# Altium PCB Jlink_V9.PcbDoc
Units mm, origin at the board's own origin, x right, y up, seen from the top; angles counter-clockwise.
Board outline 35.79 x 32.89 mm, 2 copper layers (Top Layer, Bottom Layer); 46 components, 34 nets, 199 pads, 132 vias.
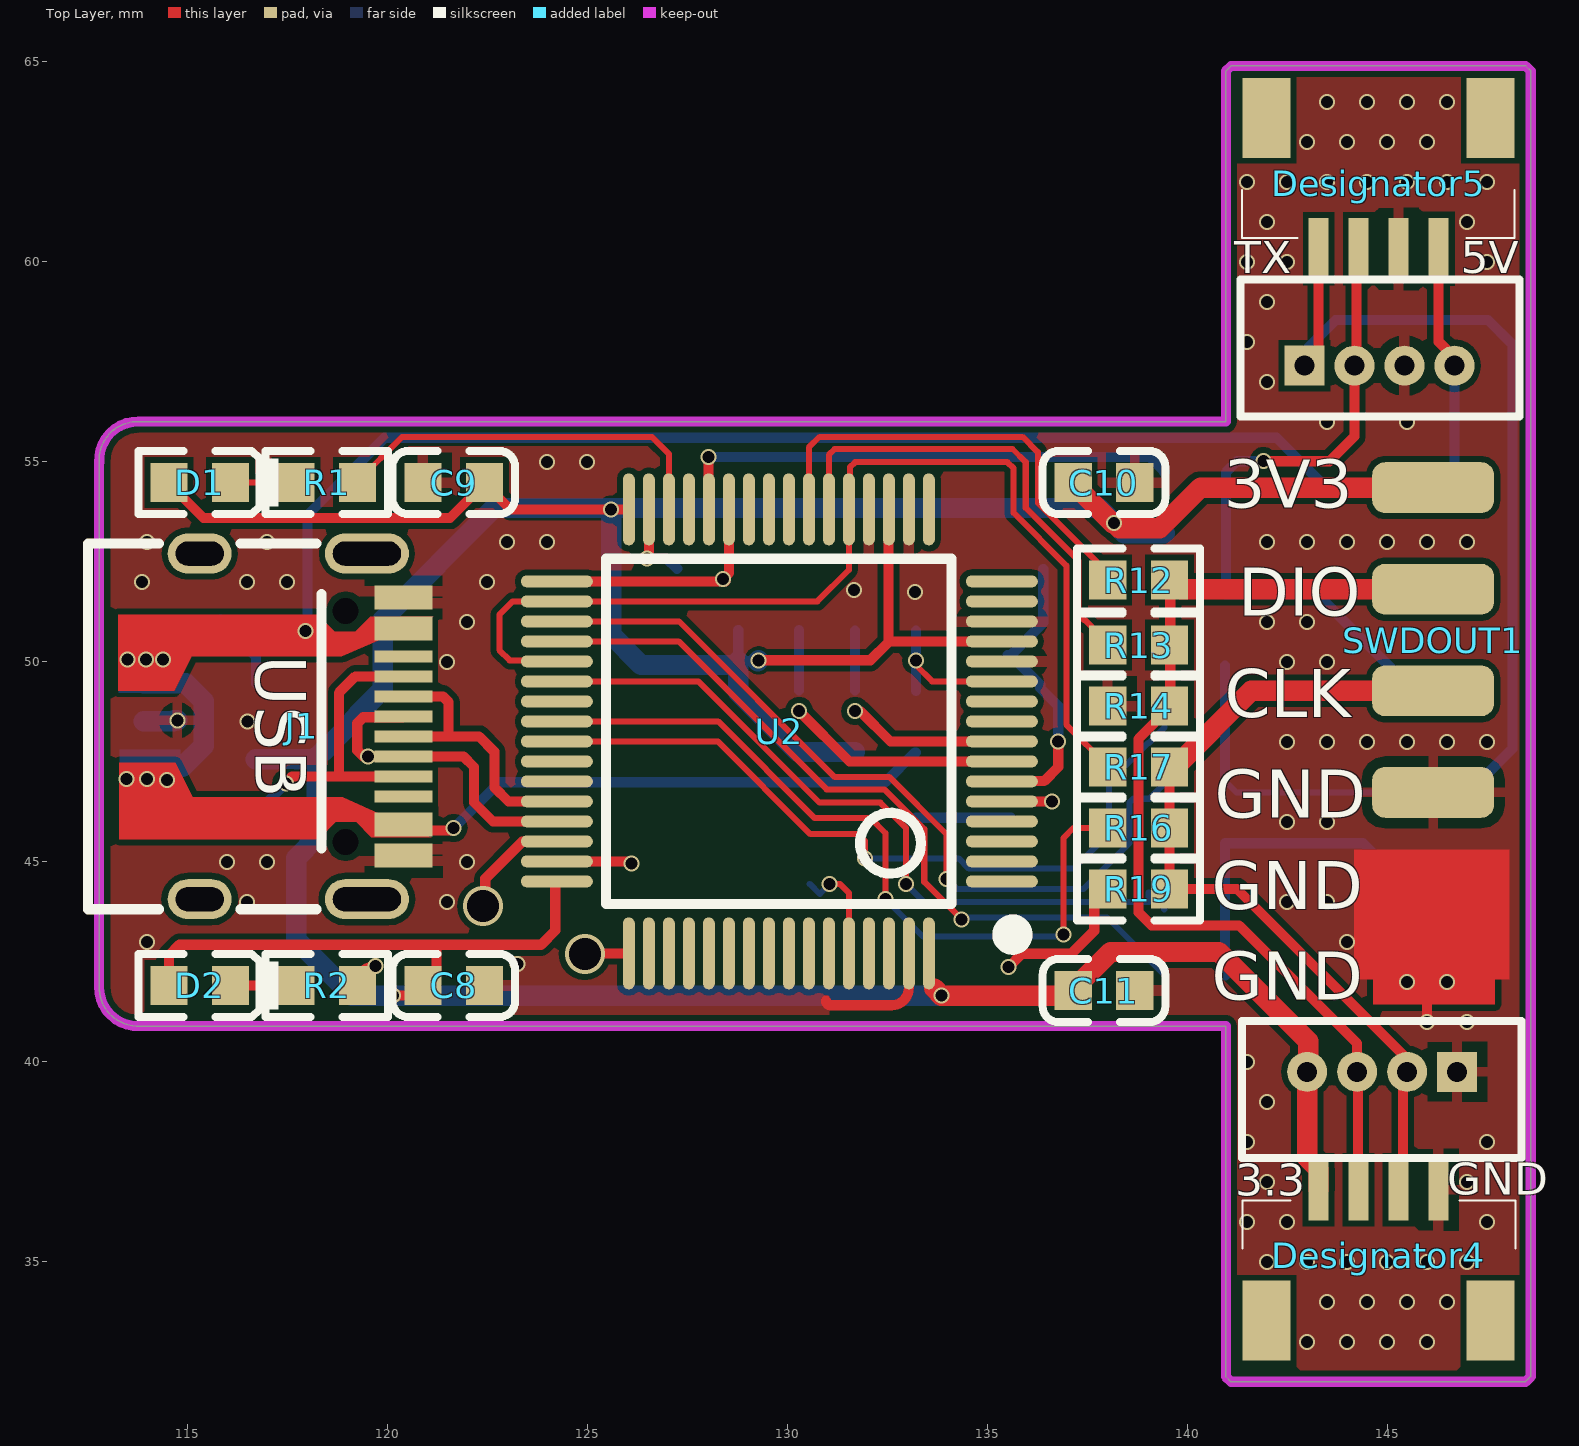
[diagram p0: Top Layer view]
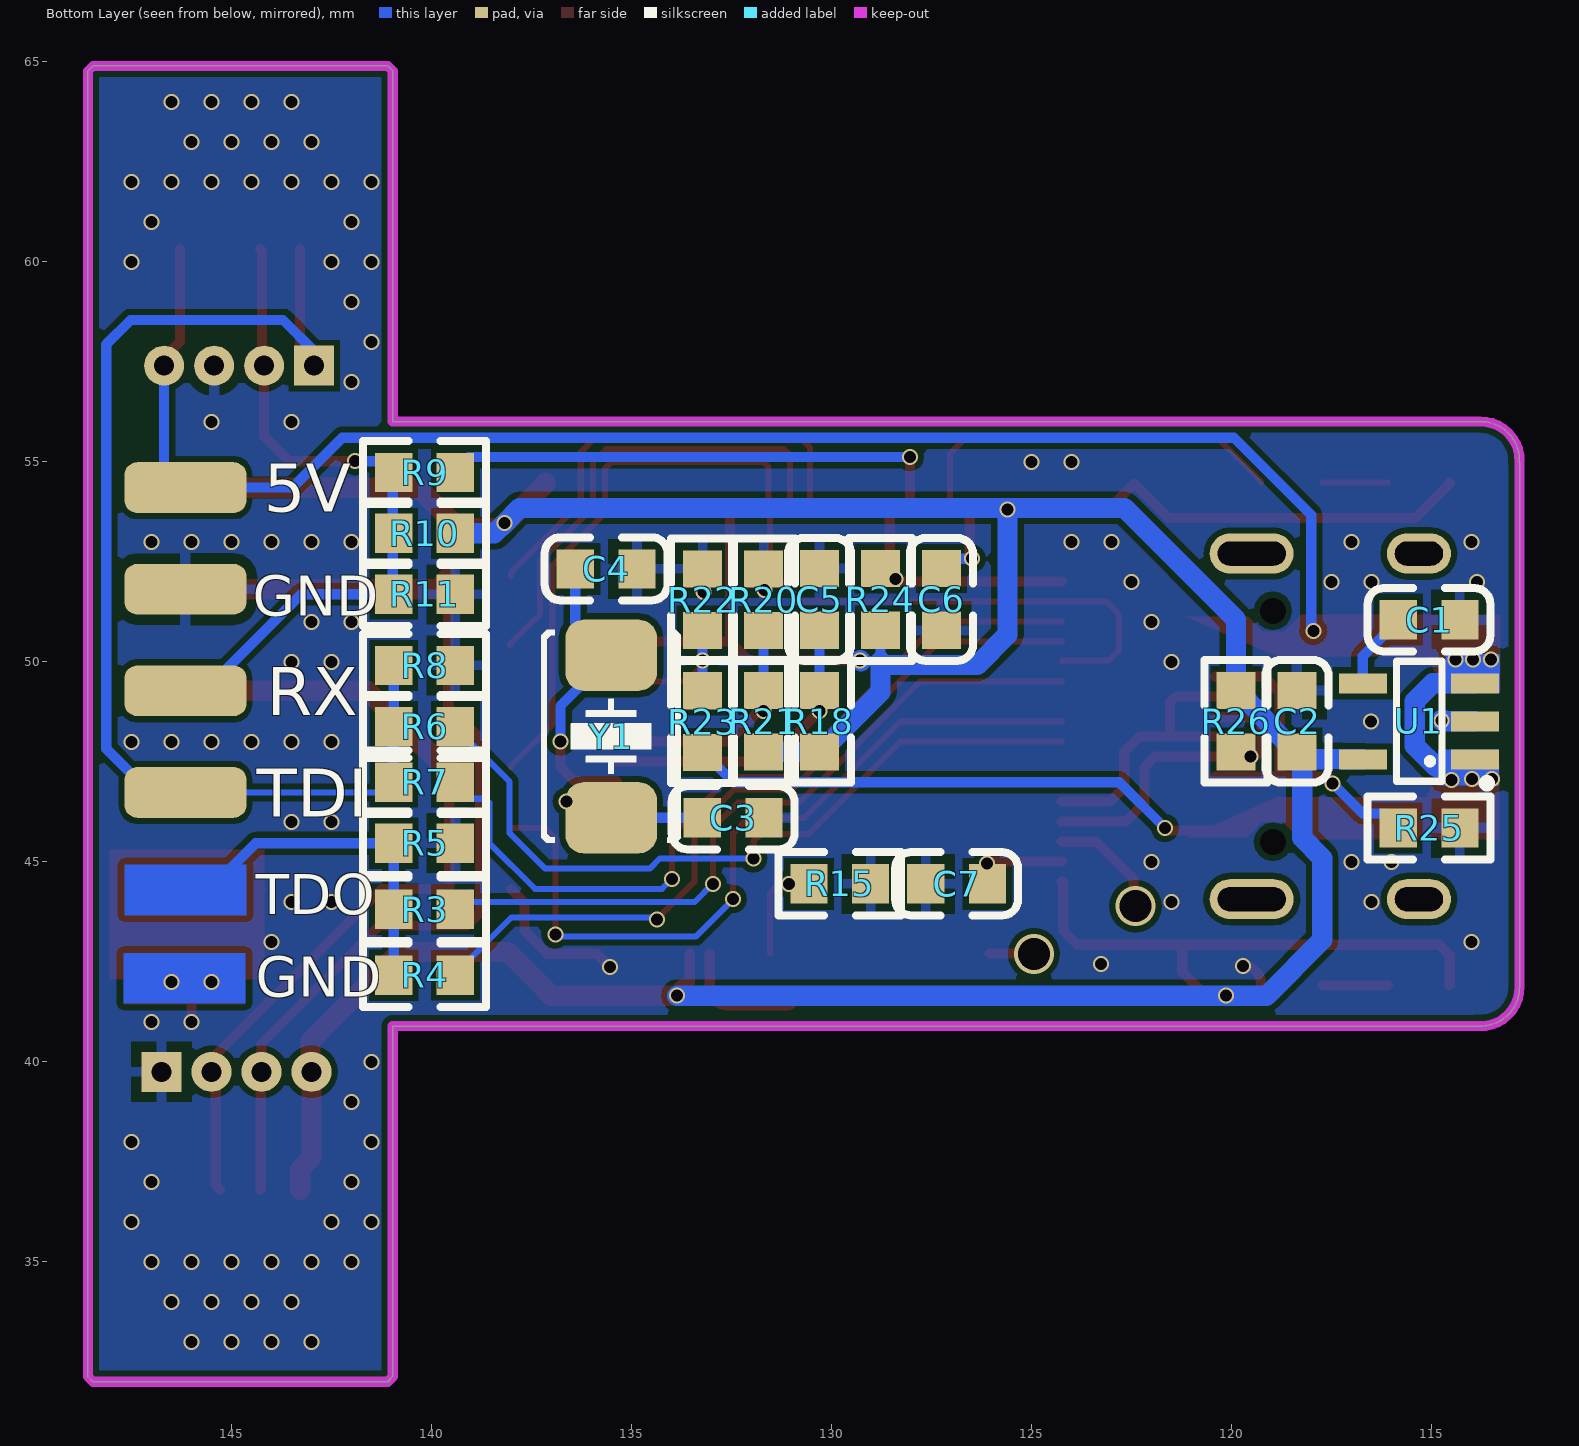
[diagram p1: Bottom Layer view, seen from below]
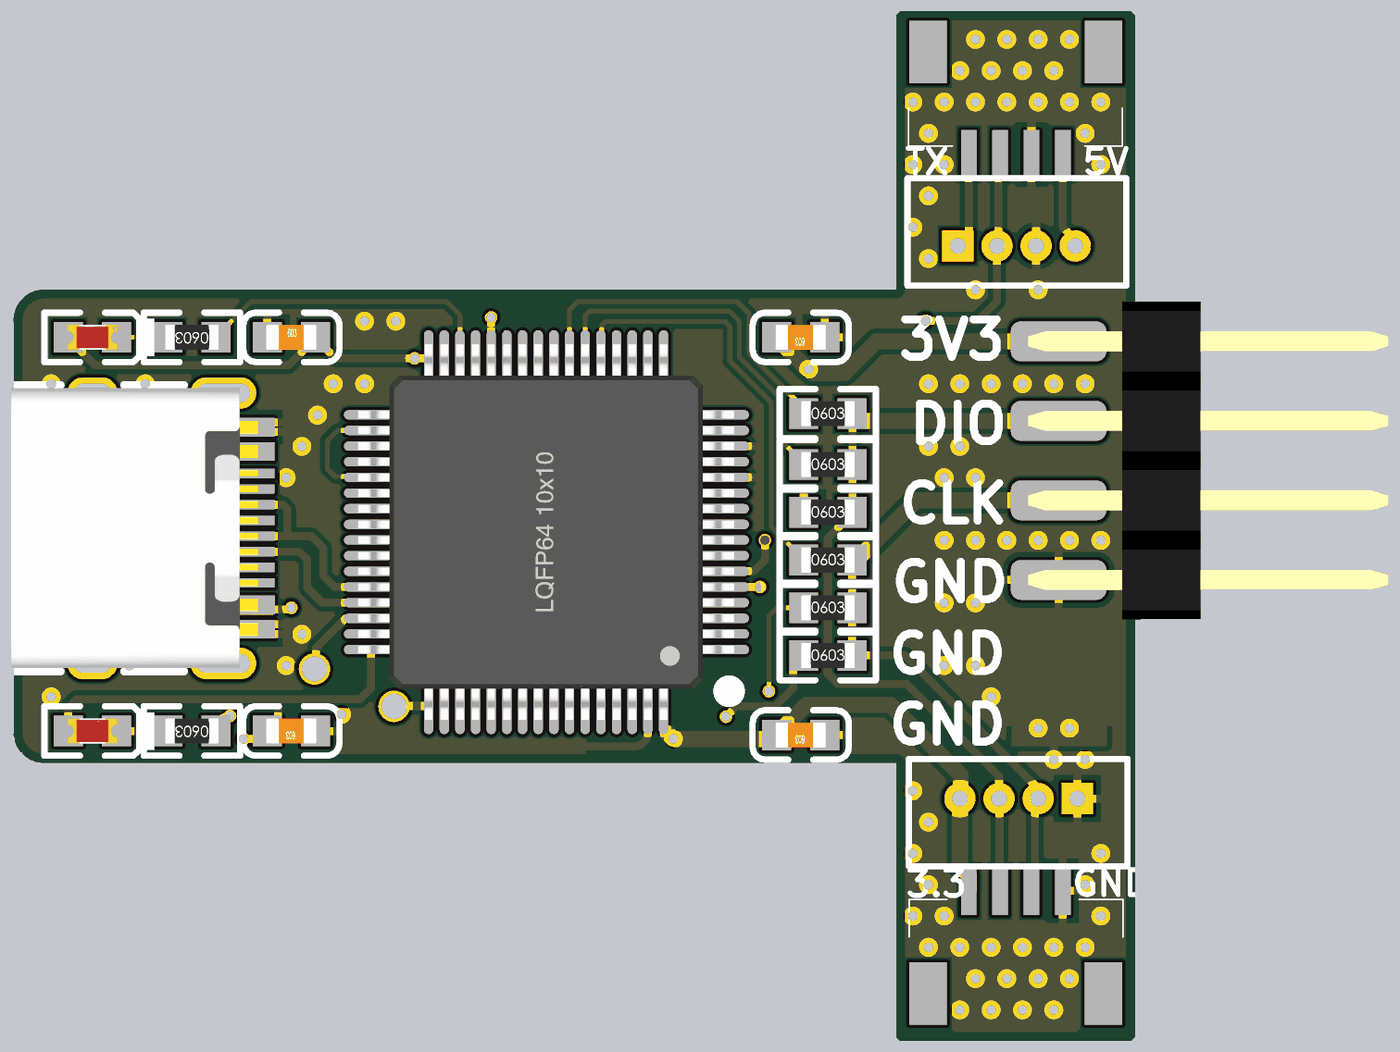
[diagram p2: 3D render of the assembled board from above, using the file's embedded part models]
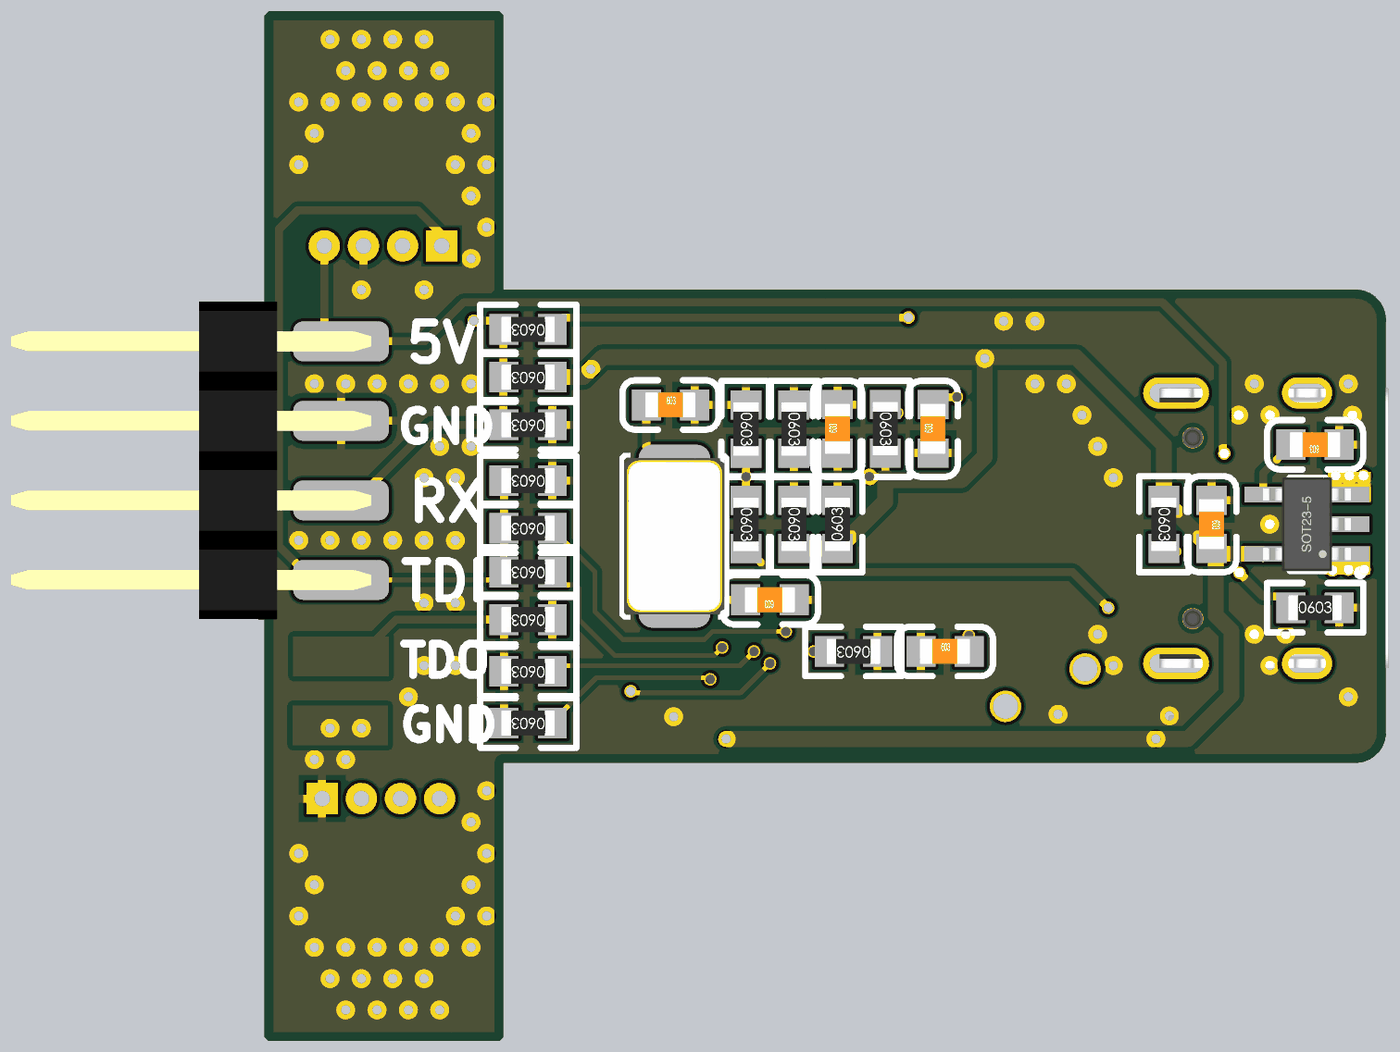
[diagram p3: 3D render of the assembled board from below, using the file's embedded part models]

## Layer stack, top to bottom
Top Solder: solder mask 0.0102, Solder Resist, Dk 3.5
Top Layer: signal copper 0.0356
Dielectric 1: dielectric 0.32, FR-4, Dk 4.8
Bottom Layer: signal copper 0.0356
Bottom Solder: solder mask 0.0102, Solder Resist, Dk 3.5

## Board outline
112.801,41.885 112.801,54.991 112.802,54.991 cw(c113.767,55.042) 113.792,56.007 140.97,56.007 140.97,64.77 141.097,64.897 148.463,64.897 148.59,64.77 148.59,32.131 148.463,32.004 141.097,32.004 140.97,32.131 140.97,40.894 113.792,40.894 113.817,40.895 cw(c113.767,41.859)

## Design rules (kind name [scope] priority, off if disabled: settings)
Clearance [All] p1: gap=0.152 ignorepadtopadclearanceinfootprint=FALSE
PolygonConnect [All] p1: connectstyle=Relief reliefconductorwidth=0.254 reliefentries=4 polygonreliefangle="90 Angle" airgapwidth=0.254
RoutingVias [All] p1: holewidth=0.3 width=0.4 viastyle="Through Hole" minholewidth=0.3 minwidth=0.4 maxholewidth=0.3 maxwidth=0.4
SolderMaskExpansion [All] p1: expansion=0.102
Width [All] p1: maxlimit=0.508 minlimit=0.152 preferedwidth=0.254
30 further rules are at their usual default settings.

## Classes and differential pairs
component class Jlink_V9: C1 C2 C4 C5 C6 C7 C8 C9 C10 C11 D1 D2 J1 R1 R2 R3 R4 R5 R6 R7 R8 R9 R10 R11 R12 R13 R14 R15 R16 R17 R18 R19 R20 R21 R22 R23 R24 R25 R26 SWDOUT1 U1 U2 Y1

## Components (designator, comment, footprint, x,y, rotation, side; value= is the part's Value field where it differs from the comment)
C1 "Cap" LC-0603_C 115.062,51.054 r0 bottom value=223
C2 "Cap" LC-0603_C 118.364,48.514 r270 bottom value=104
C3 "12pf" LC-0603_C 132.461,46.101 r0 bottom
C4 "12pf" LC-0603_C 135.636,52.324 r180 bottom
C5 "Cap" LC-0603_C 130.302,51.562 r90 bottom value=104
C6 "Cap" LC-0603_C 127.254,51.562 r90 bottom value=2.2uf
C7 "Cap" LC-0603_C 126.873,44.45 r180 bottom value=2.2uf
C8 "Cap" LC-0603_C 121.666,41.91 r180 top value=104
C9 "Cap" LC-0603_C 121.666,54.483 r0 top value=104
C10 "Cap" LC-0603_C 137.922,54.483 r180 top value=104
C11 "Cap" LC-0603_C 137.922,41.783 r180 top value=104
D1 "白灯 0603" 0603_LED_S1 115.316,54.483 r180 top
D2 "白灯 0603" 0603_LED_S1 115.316,41.91 r180 top
Designator4 "Comment" 1.0MM插座_4P 141.986,33.528 r0 top
Designator5 "Comment" 1.0MM插座_4P 147.588,63.6 r180 top
J1 "USB type C" "USB Type-C-16Pin_A" 115.316,48.387 r270 top
R1 "Resistor Chip" LC-0603_R 118.491,54.483 r180 top value=102
R2 "Resistor Chip" LC-0603_R 118.491,41.91 r180 top value=102
R3 "Resistor Chip" LC-0603_R 140.176,43.815 r0 bottom value=101
R4 "Resistor Chip" LC-0603_R 140.176,42.164 r0 bottom value=101
R5 "Resistor Chip" LC-0603_R 140.176,45.466 r0 bottom value=220K
R6 "Resistor Chip" LC-0603_R 140.176,48.387 r0 bottom value=101
R7 "Resistor Chip" LC-0603_R 140.176,46.99 r0 bottom value=101
R8 "Resistor Chip" LC-0603_R 140.176,49.911 r0 bottom value=220K
R9 "Resistor Chip" LC-0603_R 140.176,54.737 r0 bottom value=101
R10 "Resistor Chip" LC-0603_R 140.176,53.213 r0 bottom value=103
R11 "Resistor Chip" LC-0603_R 140.176,51.689 r0 bottom value=103
R12 "Resistor Chip" LC-0603_R 138.787,52.045 r0 top value=221
R13 "Resistor Chip" LC-0603_R 138.787,50.419 r0 top value=331
R14 "Resistor Chip" LC-0603_R 138.787,48.895 r0 top value=103
R15 "Resistor Chip" LC-0603_R 129.794,44.45 r0 bottom value=103
R16 "Resistor Chip" LC-0603_R 138.787,45.847 r0 top value=221
R17 "Resistor Chip" LC-0603_R 138.787,47.371 r0 top value=101
R18 "Resistor Chip" LC-0603_R 130.302,48.514 r90 bottom value=103
R19 "Resistor Chip" LC-0603_R 138.787,44.323 r0 top value=103
R20 "Resistor Chip" LC-0603_R 131.699,51.554 r270 bottom value=103
R21 "Resistor Chip" LC-0603_R 131.699,48.514 r270 bottom value=103
R22 "Resistor Chip" LC-0603_R 133.223,51.554 r270 bottom value=103
R23 "Resistor Chip" LC-0603_R 133.223,48.506 r270 bottom value=103
R24 "Resistor Chip" LC-0603_R 128.778,51.562 r270 bottom value=103
R25 "Res2" LC-0603_R 115.062,45.847 r180 bottom value=10K
R26 "Res2" LC-0603_R 119.888,48.514 r270 bottom value=10K
SWDOUT1 "HDR2x6_2.54" HDR2X4_2.54_180H 146.152,54.356 r0 top
U1 "RT9193-3.3" SOT23-5N 115.319,48.514 r90 bottom
U2 "STM32F205RET6" "LQFP64 10x10_N" 129.794,48.26 r90 top
Y1 "12Mhz" XT_5032_2 135.509,48.133 r270 bottom

## Footprints (in the part's own frame and the unit in brackets; to place one, negate y for a bottom-side part, rotate by r counter-clockwise, add the part's x,y. Pads: shape width x height; smd on the part's side, far side on the other; paste and mask are expansions set on the pad)
1.0MM插座_4P [mm] "间距1.0mm"
  rect 0.5x1.55 smd: 1(4.3,3.275) 2(3.3,3.275) 3(2.3,3.275) 4(1.3,3.275)
  rect 1.2x2 smd: 5(0,0) 6(5.6,0)
  silkscreen extent -0.6,1.8 6.22,3
0603_LED_S1 [mm]
  rect 0.93x0.98 smd: A(0.77,0) K(-0.77,0)
  silkscreen extent -1.97,-0.79 1.54,0.79, body extent -0.8,-0.4 0.8,0.4, height 0.6
HDR2X4_2.54_180H [mil]
  rrect50% 120x50 smd: 1(0,0) 3(0,-100) 5(0,-200) 7(0,-300)
  rrect50% 120x50 smd far side: 2(0,0) 4(0,-100) 6(0,-200) 8(0,-300)
  body extent -38,-350 415,50, height 78
LC-0603_C [mm]
  rect 0.93x0.98 smd: 1(-0.77,0) 2(0.77,0)
  silkscreen extent -1.53,-0.79 1.54,0.79, body extent -0.8,-0.4 0.8,0.4, height 0.3
LC-0603_R [mm]
  rect 0.93x0.98 smd: 1(-0.77,0) 2(0.77,0)
  silkscreen extent -1.53,-0.79 1.54,0.79, body extent -0.85,-0.4 0.85,0.4, height 0.56
"LQFP64 10x10_N" [mm] "64脚，体宽10x10mm，脚距0.5mm"
  oval 0.3x1.8 smd: 1(-3.75,-5.575) 2(-3.25,-5.575) 3(-2.75,-5.575) 4(-2.25,-5.575) 5(-1.75,-5.575) 6(-1.25,-5.575) 7(-0.75,-5.575) 8(-0.25,-5.575) 9(0.25,-5.575) 10(0.75,-5.575) 11(1.25,-5.575) 12(1.75,-5.575) 13(2.25,-5.575) 14(2.75,-5.575) 15(3.25,-5.575) 16(3.75,-5.575) 33(3.75,5.55) 34(3.25,5.55) 35(2.75,5.55) 36(2.25,5.55) 37(1.75,5.55) 38(1.25,5.55) 39(0.75,5.55) 40(0.25,5.55) 41(-0.25,5.55) 42(-0.75,5.55) 43(-1.25,5.55) 44(-1.75,5.55) 45(-2.25,5.55) 46(-2.75,5.55) 47(-3.25,5.55) 48(-3.75,5.55)
  oval 1.8x0.3 smd: 17(5.55,-3.75) 18(5.55,-3.25) 19(5.55,-2.75) 20(5.55,-2.25) 21(5.55,-1.75) 22(5.55,-1.25) 23(5.55,-0.75) 24(5.55,-0.25) 25(5.55,0.25) 26(5.55,0.75) 27(5.55,1.25) 28(5.55,1.75) 29(5.55,2.25) 30(5.55,2.75) 31(5.55,3.25) 32(5.55,3.75) 49(-5.55,3.75) 50(-5.55,3.25) 51(-5.55,2.75) 52(-5.55,2.25) 53(-5.55,1.75) 54(-5.55,1.25) 55(-5.55,0.75) 56(-5.55,0.25) 57(-5.55,-0.25) 58(-5.55,-0.75) 59(-5.55,-1.25) 60(-5.55,-1.75) 61(-5.55,-2.25) 62(-5.55,-2.75) 63(-5.55,-3.25) 64(-5.55,-3.75)
  silkscreen extent -5.33,-6.09 4.32,4.32, body extent -6,-6 6,6, height 1.45
SOT23-5N [mm] "3x1.6x1.1mm(长宽高)"
  rect 0.5x1.2 smd: 1(-0.95,-1.4) 2(0,-1.4) 3(0.95,-1.4) 4(0.95,1.4) 5(-0.95,1.4)
  silkscreen extent -1.63,-1.78 1.5,0.56, body extent -1.5,-1.4 1.5,1.4, height 1.15
"USB Type-C-16Pin_A" [mm]
  round 0 hole 0.65: 0(-2.89,3.65) 0(2.89,3.65)
  oval 1x2.1 hole 0.6 slot 1.7 at 90 deg: 1(-4.32,4.18) 1(4.32,4.18)
  oval 1x1.6 hole 0.6 slot 1.2 at 90 deg: 1(-4.32,0) 1(4.32,0)
  rect 0.3x1.45 smd: A1(-3.375,5.092) A4(-2.6,5.092) A5(-1.25,5.092) A6(-0.25,5.092) A7(0.25,5.092) A8(-1.75,5.092) A9(2.6,5.1) A12(3.375,5.1) B1(3.075,5.1) B4(2.3,5.1) B5(1.75,5.092) B6(0.75,5.092) B7(-0.75,5.092) B8(1.25,5.092) B9(-2.3,5.092) B12(-3.075,5.092)
  silkscreen extent -4.57,-2.79 4.57,3.05, body extent -4.47,-2.6 4.47,5.3, height 3.25
XT_5032_2 [mil]
  rrect50% 70x90 smd: 1(-80,0) 2(80,0)
  silkscreen extent -105,-69 105,69, body extent -98,-63 98,63, height 39

## Part data
C1 C2 C5 C6 C7 C8 C9 C10 C11: "Polarized Capacitor (Radial)", Published=8-Jun-2000, Publisher="Altium Limited", Revision="July-2002: Re-released for DXP Platform."
C3 C4: library part CAP
D1 D2: library part "0603 白灯", "发光二极管", Package=0603, SuppliersPartNumber=C2290, ComponentLink1Description=¹©Ó, ComponentLink1URL=http://www.szlcsc.com/product/details_2663.html, Supplier=LC
J1: library part USB_C
R1 R2 R3 R4 R5 R6 R7 R8 R9 R10 R11 R12 R13 R14 R15 R16 R17 R18 R19 R20 R21 R22 R23 R24: library part Resistor, Published=8-Jun-2000, Publisher="Altium Limited", Revision="July-2002: Re-released for DXP Platform."
R25 R26: "Resistor", LatestRevisionDate=17-Jul-2002, LatestRevisionNote="Re-released for DXP Platform.", PackageReference=AXIAL-0.4, Published=8-Jun-2000, Publisher="Altium Limited"
SWDOUT1: library part HDR2x4_2.54, "Header"
U1: library part RT9193-33, "3.3V超低压差LDO"
U2: "Microcontroller   ST", Brand=ST, Code=104261, InitialReleaseDate=25-Mar-2015, LatestRevisionDate=25-Mar-2015, PackageReference=SQFP10x10-64, Vision=V5.0
Y1: library part XTAL_1, "Crystal Oscillator", LatestRevisionDate=17-Jul-2002, LatestRevisionNote="Re-released for DXP Platform.", PackageDescription="Crystal, Thru-Hole; 2 Leads; Body 3.1 x 8.2 mm (Dia.xH)", PackageReference=R38, Published=8-Jun-2000, Publisher="Altium Limited"

## Free pads (board coordinates)
  rect 1x1 hole 0.5: 1(142.935,57.404) 1(146.752,39.751)
  round 1 hole 0.5: 2(144.185,57.404) 2(145.502,39.751) 3(144.252,39.751) 3(145.435,57.404) 4(143.002,39.751) 4(146.685,57.404)

## Via types
v1: diameter 0.4, hole 0.3, Top Layer to Bottom Layer, 130 vias
v2: diameter 1, hole 0.8, Top Layer to Bottom Layer, 2 vias

## Nets (pads, with @x,y where several pads share a name; then routed paths per layer and width w, separated by ;. In a path a pad name is that pad's centre, name@x,y a point inside that pad or via, vN(x,y) a via of type N, cw(c..) or ccw(c..) an arc to the next point about the centre after c; other vN are vias at no path point)
3V3: C2.2 C8.2 C9.2 C10.2 C11.2 D1.A D2.A Designator4.4 pad.4@143.002,39.751 R10.1 R18.1 R21.2 R24.2 R26.1 SWDOUT1.1 U1.5 U2.13 U2.19 U2.32 U2.48 U2.64 | length 123.1
  Top Layer w0.254: D2.A 114.546,42.664 114.808,42.926 121.234,42.926 ; D1.A 114.546,54.458 115.41,53.594 121.572,53.594 122.436,54.458 123.084,53.81 v1(125.603,53.81) U2.32 ; v1(120.142,41.656) 120.642,41.656 C8.2 121.234,42.248 121.234,42.926 ; U2.48 124.227,44.51 124.206,44.489 124.206,43.282 123.85,42.926 121.234,42.926 ; v1(129.286,50.038) 132.08,50.038 132.535,50.493 ; U2.19 132.535,53.801 132.535,50.493 ; U2.64 133.544,41.972 U2.64@133.572,41.944 ; U2.13 132.552,50.51 132.535,50.493
  Top Layer w0.508: 133.68,41.834 v1(133.858,41.656) 137.025,41.656 C11.2 ; C10.2 137.152,54.458 138.143,53.467 v1(138.176,53.467) 138.303,53.34 139.319,53.34 140.335,54.356 SWDOUT1.1 ; C11.2@137.156,41.787 137.156,41.812 138.092,42.748 140.792,42.748 143.027,40.513 143.027,39.776 143.002,39.751 143.002,37.604 143.286,37.32 Designator4.4
  Bottom Layer w0.254: R24.2 128.778,50.017 v1@129.265,50.017 ; R18.1 R21.2
  Bottom Layer w0.508: U1.5 116.723,47.568 117.221,47.568 117.224,47.571 117.726,47.571 117.729,47.568 118.188,47.568 C2.2@118.234,47.614 ; v1@125.603,53.721 125.603,50.673 126.355,49.921 128.778,49.921 ; 128.778,50.017 128.778,49.921 ; v1@129.265,50.017 v1(129.286,50.038) ; R21.2 R18.1 130.277,47.744 128.778,49.243 128.778,49.921 ; v1(133.858,41.656) v1(120.142,41.656) 119.126,41.656 117.729,43.053 117.729,45.093 118.234,45.599 C2.2@118.234,47.614 ; R10.1@139.438,53.213 R10.1 138.43,53.213 v1(138.176,53.467) 137.795,53.848 125.641,53.848 v1(125.603,53.81) 125.603,53.848 122.682,53.848 119.888,51.054 R26.1 119.863,49.284 119.26,48.681 119.26,48.651 118.992,48.382 118.992,48.347 118.389,47.744 C2.2 C2.2@118.234,47.614
5V: Designator5.4 J1.A4 J1.A9 J1.B4 J1.B9 pad.4@146.685,57.404 R23.2 SWDOUT1.2 U1.1 U1.3 | length 56.4
  Top Layer w0.254: J1.A9 121.566,45.787 121.626,45.847 v1(121.666,45.847) ; Designator5.4 146.288,58.003 146.685,57.606 pad.4@146.685,57.404
  Bottom Layer w0.254: v1(117.958,50.775) 118.008,50.825 118.008,53.67 119.939,55.601 142.235,55.601 143.479,54.356 146.431,54.356 146.685,54.61 pad.4@146.685,57.404 ; v1(121.666,45.847) 122.809,46.99 132.452,46.99 133.198,47.736 R23.2
  Bottom Layer w0.508: U1.3 114.968,49.464 115.418,49.014 115.418,47.904 114.884,47.371 114.579,47.371
  other v1: 114.503,47.041 113.487,47.066 113.995,47.066 113.513,50.063 113.97,50.063 114.402,50.063
cc1: J1.A5 J1.B8 R25.1 | length 9
  Top Layer w0.254: v1(117.475,46.965) 117.475,46.988 117.624,47.137 118.796,47.137 ; J1.B8 118.796,47.137 ; J1.A5 119.208,49.637 118.796,49.225 118.796,47.137
  Bottom Layer w0.254: R25.1 115.832,45.872 116.17,46.21 116.72,46.21 v1(117.475,46.965)
GND: C1.1 C2.1 C3.1 C4.2 C5.2 C6.1 C7.1 C8.1 C9.1 C10.1 C11.1 Designator4.1 Designator5.3 J1.A1 J1.A12 J1.B1 J1.B12 pad.1@146.752,39.751 pad.3@145.435,57.404 R2.1 R5.1 R8.1 R11.1 R14.1 R15.1 R19.1 R20.1 R22.1 R25.2 SWDOUT1.4 SWDOUT1.7 U1.2 U2.12 U2.14 U2.18 U2.20 U2.63 | length 13
  Top Layer w0.254: R2.1 119.261,41.943 cw(c119.71,41.943) v1(119.71,42.393) ; 130.973,41.531 ccw(c131.088,41.531) 131.088,41.415 132.613,41.415 ccw(c132.613,41.846) 133.044,41.846 U2.63 ; v1(135.534,42.367) 135.868,42.701 137.105,42.701 137.679,43.275 137.679,43.985 R19.1 ; 144.272,44.323 144.348,44.247 146.152,44.247 ; 144.323,42.291 145.209,42.291 v1(145.5,42) 145.554,42 146,41.554 v1(146,41)
  Bottom Layer w0.508: U1.2 113.923,48.518 114.66,48.518 114.681,48.539 v1(114.757,48.539)
  other v1: 143,33 144,33 145,33 146,33 143.5,34 144.5,34 145.5,34 146.5,34 142,35 143,35 144,35 145,35 146,35 147,35 141.5,36 142.5,36 147.5,36 142,37 147,37 141.5,38 147.5,38 142,39 141.5,40 147,41 146.5,42 123.266,42.443 114,43 144,43 116.5,44 121.5,44 142.5,44 143.5,44 116,45 117,45 122,45 142.5,46 143.5,46 142.5,48 143.5,48 144.5,48 145.5,48 146.5,48 147.5,48 116.51,48.514 121.5,50 142.5,50 143.5,50 122,51 142,51 143,51 133.198,51.74 131.674,51.791 113.868,51.994 116.5,52 117.5,52 122.5,52 114,53 117,53 123,53 124,53 142,53 143,53 144,53 145,53 146,53 147,53 124,55 125,55 143.5,56 145.5,56 142,57 141.5,58 142,59 141.5,60 142.5,60 147.5,60 142,61 147,61 141.5,62 142.5,62 143.5,62 144.5,62 145.5,62 146.5,62 147.5,62 143,63 144,63 145,63 146,63 143.5,64 144.5,64 145.5,64 146.5,64
LED: R1.1 U2.30 | length 9.8
  Top Layer w0.152: R1.1 119.261,54.508 120.379,55.626 126.619,55.626 127.044,55.201 U2.30
NetC1_2: C1.2 U1.4 | length 2
  Bottom Layer w0.254: C1.2 115.832,51.029 116.719,50.142 U1.4
NetC5_1: C5.1 R18.2 U2.7 | length 7.1
  Top Layer w0.254: v1(130.302,48.768) 131.56,47.51 U2.7
  Bottom Layer w0.254: R18.2 C5.1
NetC6_2: C6.2 U2.31 | length 2.1
  Top Layer w0.254: v1(126.492,52.578) 126.544,52.63 U2.31
  Bottom Layer w0.254: v1(126.492,52.578) 126.992,52.578 127.246,52.324 C6.2
NetC7_2: C7.2 U2.47 | length 1.9
  Top Layer w0.254: U2.47 126.059,45.01 v1(126.111,44.958)
NetD1_K: D1.K R1.2 | length 1.6
  Top Layer w0.152: D1.K R1.2
NetD2_K: D2.K R2.2 | length 1.6
  Top Layer w0.254: D2.K R2.2
NetJ1_0: 
NetR15_2: R15.2 U2.60 | length 2.8
  Top Layer w0.152: v1(131.064,44.45) 131.318,44.45 131.544,44.224 U2.60
  Bottom Layer w0.152: R15.2 130.818,44.196 131.064,44.442 v1(131.064,44.45)
OSC1: C3.2 U2.5 Y1.2 | length 3.6
  Top Layer w0.254: U2.5 v1(136.624,46.51)
  Bottom Layer w0.254: C3.2@133.223,46.101 Y1.2 Y1.2@135.591,46.101
OSC2: C4.1 U2.6 Y1.1 | length 7.4
  Top Layer w0.254: U2.6 135.378,47.019 136.427,47.019 136.779,47.371 v1(136.779,48.006)
  Bottom Layer w0.254: Y1.1 Y1.1@135.591,50.165 ; C4.1 136.406,50.98 Y1.1@135.591,50.165 ; v1(136.779,48.006) 136.779,48.895 136.329,49.345 136.329,49.427 Y1.1@135.591,50.165
PA5: R17.1 U2.21 U2.34 U2.37 | length 26.9
  Top Layer w0.152: U2.37 124.216,50.038 123.063,50.038 122.809,50.292 122.809,51.181 123.138,51.51 U2.34 130.758,51.51 131.544,52.296 U2.21 131.572,53.838 131.572,54.864 131.699,54.991 135.509,54.991 135.661,54.839 135.661,53.722 136.982,52.402 136.982,48.431 138.017,47.396 R17.1
PA6: R13.1 U2.22 | length 11.9
  Top Layer w0.152: U2.22 131.044,55.174 131.191,55.321 135.636,55.321 135.966,54.991 135.966,53.849 137.287,52.528 137.287,51.181 137.42,51.048 137.437,51.048 138.041,50.444 R13.1@138.041,50.419
PA7: R12.1 U2.23 | length 11.4
  Top Layer w0.152: U2.23 130.544,55.36 130.81,55.626 135.89,55.626 136.271,55.245 136.271,53.975 138.017,52.229 R12.1@138.017,52.133
PA8: R6.1 U2.41 | length 19
  Top Layer w0.152: U2.41 128.266,48.01 130.581,45.695 131.775,45.695 131.953,45.517 v1(131.953,45.085)
  Bottom Layer w0.152: v1(131.953,45.085) 134.289,45.085 134.543,44.831 137.16,44.831 138.049,45.72 138.049,46.998 139.024,47.973 139.049,47.973 139.438,48.362 R6.1@139.438,48.387
PB1: R24.1 U2.27 U2.33 | length 6.1
  Top Layer w0.254: U2.33 128.457,52.01 v1(128.397,52.07) 128.544,52.217 U2.27
PB2: R9.1 U2.28 | length 12.9
  Top Layer w0.254: v1(128.041,55.118) 128.035,55.112 128.035,53.819 U2.28
  Bottom Layer w0.254: v1(128.041,55.118) 139.074,55.118 139.43,54.762 R9.1@139.43,54.737
PB14: R7.1 U2.35 | length 20.3
  Top Layer w0.152: U2.35 127.298,51.01 131.191,47.117 132.561,47.117 133.985,45.693 v1(133.985,44.577)
  Bottom Layer w0.152: v1(133.985,44.577) 134.239,44.323 137.414,44.323 138.557,45.466 138.557,46.478 138.656,46.576 139.049,46.576 R7.1@139.438,46.965
PB15: R4.1 U2.36 | length 19.5
  Top Layer w0.152: U2.36 127.29,50.51 130.988,46.812 132.435,46.812 133.429,45.818 133.429,44.498 v1(134.366,43.561)
  Bottom Layer w0.152: v1(134.366,43.561) 134.414,43.609 138.002,43.609 139.422,42.189 R4.1@139.422,42.164
PC0: R20.2 R21.1 U2.8 | length 5.5
  Top Layer w0.254: v1(131.699,48.768) 131.826,48.768 132.584,48.01 U2.8
  Bottom Layer w0.254: R21.1 R20.2
PC3: R22.2 R23.1 U2.11 | length 3.9
  Top Layer w0.152: v1(133.223,50.03) 133.223,49.911 133.624,49.51 U2.11
  Bottom Layer w0.254: R23.1 v1(133.223,50.03) R22.2
PC7: R3.1 U2.38 | length 18.7
  Top Layer w0.152: U2.38 127.782,49.51 130.81,46.482 132.334,46.482 132.969,45.847 v1(132.969,44.45)
  Bottom Layer w0.152: v1(132.969,44.45) 133.426,43.993 139.041,43.993 139.041,44.229 139.43,43.84 R3.1@139.43,43.815
PC9: R16.1 U2.40 | length 19.5
  Top Layer w0.152: U2.40 128.274,48.51 130.683,46.101 132.08,46.101 132.461,45.72 v1(132.461,44.069) ; v1(136.906,43.18) 136.906,45.593 137.16,45.847 R16.1@138.041,45.847
  Bottom Layer w0.152: v1(132.461,44.069) 133.398,43.132 136.858,43.132 v1(136.906,43.18)
RXD: Designator5.2 pad.2@144.185,57.404 R9.2 R10.2 R11.2 SWDOUT1.6 | length 17.8
  Top Layer w0.254: v1(141.91,55.016) 143.561,55.016 144.185,55.641 144.185,57.404 144.236,57.455 144.236,60.273 Designator5.2
  Bottom Layer w0.254: v1(141.91,55.016) 141.249,55.016 140.97,54.737 140.97,51.689 143.256,51.689 145.669,49.276 SWDOUT1.6@146.431,49.276
TCK: Designator4.2 pad.2@145.502,39.751 R16.2 R17.2 R19.2 SWDOUT1.5 | length 21.8
  Top Layer w0.254: R17.2 139.557,44.347 139.581,44.323 141.249,44.323 145.502,40.07 145.502,39.751 145.394,39.643 145.394,36.911 Designator4.2
  Top Layer w0.508: R17.2 139.7,47.371 141.605,49.276 SWDOUT1.5 SWDOUT1.5@146.431,49.276
TDI-Y: Designator5.1 pad.1@142.935,57.404 R6.2 R7.2 R8.2 SWDOUT1.8 | length 29.9
  Top Layer w0.254: pad.1@142.935,57.404 143.288,57.757 Designator5.1
  Bottom Layer w0.152: R7.2@140.978,46.99 141.232,46.736 SWDOUT1.8
  Bottom Layer w0.254: R7.2 R6.2 R8.2 ; pad.1@142.935,57.404 142.935,57.769 143.713,58.547 147.523,58.547 148.133,57.937 148.133,47.828 147.041,46.736 SWDOUT1.8
TDO: R3.2 R4.2 R5.2 | length 8.6
  Bottom Layer w0.254: R4.2@140.962,42.164 140.946,42.18 R5.2 144.399,45.466 145.542,44.323 ; 147.168,44.348 147.32,44.196
TMS: Designator4.3 pad.3@144.252,39.751 R12.2 R13.2 R14.2 SWDOUT1.3 | length 26.2
  Top Layer w0.254: R12.2@139.581,52.084 139.581,50.419 139.581,48.895 139.581,48.87 138.785,48.074 138.785,43.739 139.116,43.409 141.3,43.409 144.252,40.457 144.252,39.751 144.269,39.734 144.269,36.82 Designator4.3
  Top Layer w0.508: R12.2@139.581,52.02 R12.2@139.605,51.996 ; R12.2@139.581,52.084 139.849,51.816 SWDOUT1.3 SWDOUT1.3@146.431,51.816 ; R12.2@139.581,52.096 R12.2@139.581,52.121
USB_DM: J1.A7 J1.B7 U2.44 | length 7.1
  Top Layer w0.254: J1.A7 120.412,48.133 121.539,48.133 ; J1.B7 121.39,49.137 121.539,48.988 121.539,48.133 ; U2.44 123.035,46.51 122.682,46.863 122.682,47.752 122.301,48.133 121.539,48.133
USB_DP: J1.A6 J1.B6 R26.2 U2.45 | length 8.2
  Top Layer w0.254: J1.A6 120.385,48.614 119.402,48.614 119.253,48.465 119.253,47.786 119.402,47.637 J1.B6 121.908,47.637 122.174,47.371 122.174,46.482 122.646,46.01 U2.45
  other v1: 119.529,47.637
pads on no net: Designator4.5 Designator4.6 Designator5.5 Designator5.6 J1.0 J1.1 J1.A8 J1.B5 U2.1 U2.2 U2.3 U2.4 U2.9 U2.10 U2.15 U2.16 U2.17 U2.24 U2.25 U2.26 U2.29 U2.39 U2.42 U2.43 U2.46 U2.49 U2.50 U2.51 U2.52 U2.53 U2.54 U2.55 U2.56 U2.57 U2.58 U2.59 U2.61 U2.62
copper on no net: | length 3.9
  Top Layer w0.254: v2@122.453,43.917 122.453,44.577 123.378,45.501 124.235,45.501 124.244,45.51 ; v2(124.943,42.697) 124.955,42.71 126.044,42.71
  other v2: 122.403,43.891

## Polygon pours and split planes (outlines as drawn)
GND on Bottom Layer "Bottom Layer-GND" (solid, remove dead copper, pour order 7): 112.192,67.691 147.828,67.691 cw(c147.828,65.278) 150.241,65.278 150.241,33.452 cw(c147.701,33.452) 147.701,30.912 114.275,30.912 cw(c114.275,33.452) 111.735,33.452 111.735,35.204
no net on Bottom Layer "Bottom Layer-No Net" (solid, pour order 9): 114.986,67.742
GND on Top Layer "Top Layer-GND" (solid, remove dead copper, pour order 5): 112.268,69.139 146.964,69.139 cw(c146.964,66.599) 149.504,66.599 149.504,32.436 cw(c147.472,32.436) 147.472,30.404 114.249,30.404 cw(c114.249,32.944) 111.709,32.944 111.709,67.64 cw(c113.284,67.64) 113.284,69.215

## Keep-outs
Keep-Out Layer:
  lines w0.254: 112.801,54.991 112.801,41.935 112.801,41.885 ccw(c113.767,41.859) 113.817,40.895 ; 112.802,54.991 cw(c113.767,55.042) 113.792,56.007 140.97,56.007 140.97,64.77 141.097,64.897 148.463,64.897 148.59,64.77 148.59,54.737 148.59,42.164 148.59,32.131 148.463,32.004 141.097,32.004 140.97,32.131 140.97,40.894 113.792,40.894

## Other copper
Top Layer:
  rectangle net GND: 144.17,42.062 148.057,45.314
  rectangle net GND: 144.653,41.427 147.701,42.697
  rectangle net GND: 144.653,43.688 147.701,44.958
  region net 5V: 118.896,46.61 115.138,46.61 114.706,47.473 113.309,47.473 113.309,45.568 118.288,45.568 118.72,45.999 119.228,45.999 119.609,45.618 121.107,45.618
  region net 5V: 118.871,50.139 115.113,50.139 114.681,49.276 113.284,49.276 113.284,51.181 118.262,51.181 118.694,50.749 119.202,50.749 119.583,51.13 121.158,51.13
  region: 121.158,50.546
Bottom Layer:
  rectangle net 5V: 113.309,46.914 114.833,47.803
  rectangle net 5V: 113.284,49.225 114.656,50.19
  rectangle net GND: 144.653,41.453 147.701,42.723
  rectangle net TDO: 144.628,43.663 147.676,44.933

## Silkscreen, mask and mechanical layers (free items; w line width, h text height)
Top Overlay:
  lines w0.2: 141.331,56.134 148.309,56.134 148.309,59.563 141.331,59.563 141.331,56.134 ; 141.378,37.592 148.356,37.592 148.356,41.021 141.378,41.021 141.378,37.592
  text "TX" at 141.173,59.715 h0.8
  text "5V" at 146.837,59.715 h0.8
  text "3V3" at 140.919,53.848 h1.2
  text "DIO" at 141.275,51.156 h1.2
  text "CLK" at 140.945,48.616 h1.2
  text "GND" at 140.691,46.101 h1.2
  text "GND" at 140.614,43.815 h1.2
  text "GND" at 140.614,41.554 h1.2
  text "GND" at 146.507,36.678 h0.8
  text "3.3" at 141.199,36.652 h0.8
Bottom Overlay:
  text "5V" at 144.196,53.746 h1.2
  text "GND" at 144.475,51.156 h1
  text "RX" at 144.12,48.666 h1.2
  text "TDI" at 144.374,46.126 h1.2
  text "TDO" at 144.399,43.688 h1
  text "GND" at 144.399,41.631 h1
Mechanical 15:
  circle w0.05: c144.867,39.751 r0.35
  circle w0.05: c144.82,57.404 r0.35
  lines w0.05: 144.32,57.404 145.32,57.404 ; 144.367,39.751 145.367,39.751 ; 144.82,56.904 144.82,57.904 ; 144.867,39.251 144.867,40.251

## Text inside footprints (layer, text, board x,y; h text height)
J1: Top Overlay "USB" at 116.713,50.165 h1.27 r270